# Altium PCB FelineFeastPCB.PcbDoc (part 2 of 2)
Units mm, origin at the board's own origin, x right, y up, seen from the top; angles counter-clockwise.
Board outline 55 x 55 mm, 2 copper layers (Top Layer, Bottom Layer); 81 components, 60 nets, 299 pads, 12 vias.
Unrouted connection lines stored in the file: 202.
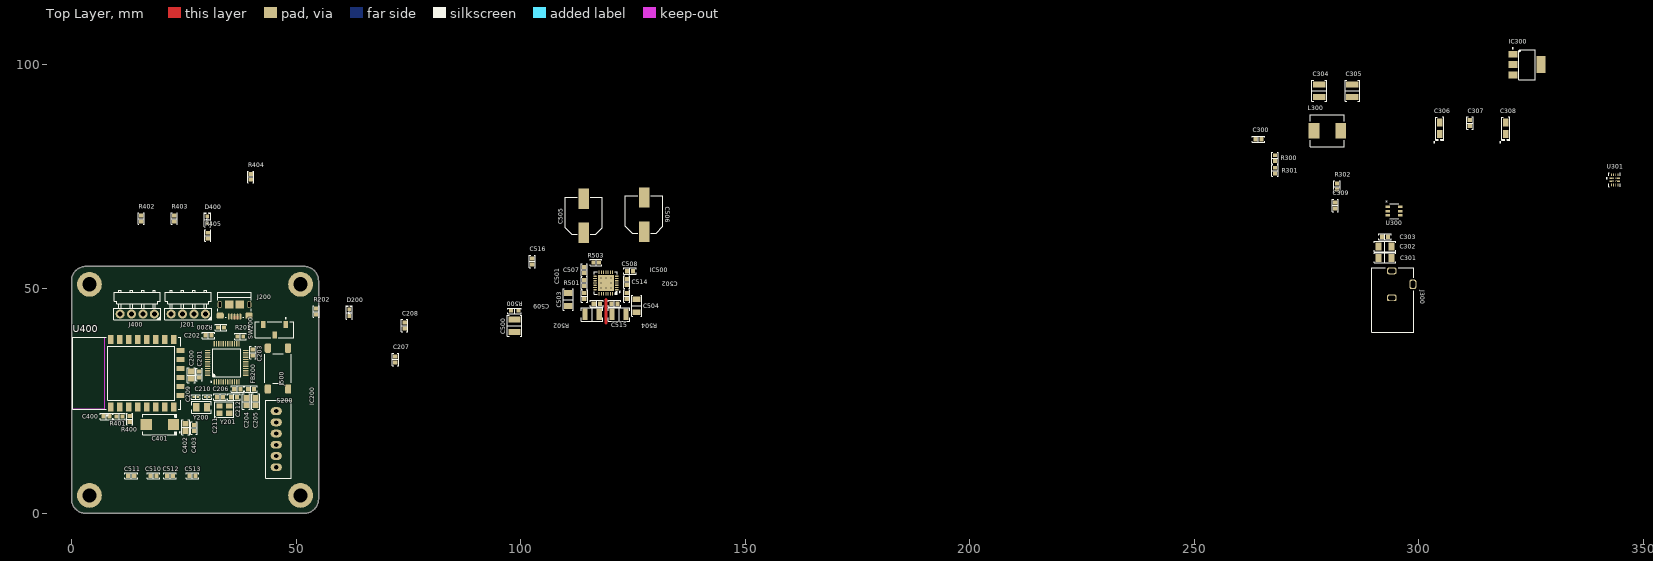
[diagram p0: Top Layer view]

## Part data (continued)
R202 R405: library part ERJ-3EKF8200V, "RES SMD 820 OHM 1% 1/10W 0603", Device Package="0603 (1608 Metric)", Manufacturer="Panasonic Electronic Components", Operating Temperature="-55°C ~ 155°C", Power (Watts)="0.1W, 1/10W", Ratings=AEC-Q200, Supplier Device Package=0603, Supplier Part Number 1=P820HCT-ND, Temperature Coefficient=±100ppm/°C, Tolerance=±1%, ComponentLink1Description=Datasheet, ComponentLink1URL=https://industrial.panasonic.com/cdbs/www-data/pdf/RDA0000/AOA0000C304.pdf, ComponentLink2Description="DigiKey Link", ComponentLink2URL=https://www.digikey.com/en/products/detail/panasonic-electronic-components/ERJ-3EKF8200V/1746447, Composition="Thick Film", Features="Automotive AEC-Q200", Height - Seated (Max)="0.022\" (0.55mm)", LastUpdated="09.02.2024 20:41:57", Lifecycle Status=Active, Minimum Order=1, Number of Terminations=2, Package / Case="0603 (1608 Metric)", Packaging=TapeAndReel, Part Number=ERJ-3EKF8200V, Part Status=Active, PartId=25993, Price=0.01, Resistance="820 Ohms", Series=ERJ-3EK, Size / Dimension="0.063\" L x 0.031\" W (1.60mm x 0.80mm)", Supplier 1=DigiKey
R300 R501: library part ERJ-3EKF1003V, "RES SMD 100K OHM 1% 1/10W 0603", Device Package="0603 (1608 Metric)", Manufacturer="Panasonic Electronic Components", Operating Temperature="-55°C ~ 155°C", Power (Watts)="0.1W, 1/10W", Ratings=AEC-Q200, Supplier Device Package=0603, Supplier Part Number 1=P100KHCT-ND, Temperature Coefficient=±100ppm/°C, Tolerance=±1%, ComponentLink1Description=Datasheet, ComponentLink1URL=https://industrial.panasonic.com/cdbs/www-data/pdf/RDA0000/AOA0000C304.pdf, ComponentLink2Description="DigiKey Link", ComponentLink2URL=https://www.digikey.com/en/products/detail/panasonic-electronic-components/ERJ-3EKF1003V/196075, Composition="Thick Film", Features="Automotive AEC-Q200", Height - Seated (Max)="0.022\" (0.55mm)", LastUpdated="09.02.2024 20:41:59", Lifecycle Status=Active, Minimum Order=1, Number of Terminations=2, Package / Case="0603 (1608 Metric)", Packaging=TapeAndReel, Part Number=ERJ-3EKF1003V, Part Status=Active, PartId=25699, Price=0.01, Resistance="100 kOhms", Series=ERJ-3EK, Size / Dimension="0.063\" L x 0.031\" W (1.60mm x 0.80mm)", Supplier 1=DigiKey
R301: library part ERJ-3EKF1372V, "RES SMD 13.7K OHM 1% 1/10W 0603", Device Package="0603 (1608 Metric)", Manufacturer="Panasonic Electronic Components", Operating Temperature="-55°C ~ 155°C", Power (Watts)="0.1W, 1/10W", Ratings=AEC-Q200, Supplier Device Package=0603, Supplier Part Number 1=P13.7KHCT-ND, Temperature Coefficient=±100ppm/°C, Tolerance=±1%, ComponentLink1Description=Datasheet, ComponentLink1URL=https://industrial.panasonic.com/cdbs/www-data/pdf/RDA0000/AOA0000C304.pdf, ComponentLink2Description="DigiKey Link", ComponentLink2URL=https://www.digikey.com/en/products/detail/panasonic-electronic-components/ERJ-3EKF1372V/196114, Composition="Thick Film", Features="Automotive AEC-Q200", Height - Seated (Max)="0.022\" (0.55mm)", LastUpdated="09.02.2024 20:41:57", Lifecycle Status=Active, Minimum Order=1, Number of Terminations=2, Package / Case="0603 (1608 Metric)", Packaging=TapeAndReel, Part Number=ERJ-3EKF1372V, Part Status=Active, PartId=26000, Price=0.01, Resistance="13.7 kOhms", Series=ERJ-3EK, Size / Dimension="0.063\" L x 0.031\" W (1.60mm x 0.80mm)", Supplier 1=DigiKey
R302: library part ERA-3AEB5112V, "RES SMD 51.1KOHM 0.1% 1/10W 0603", Device Package="0603 (1608 Metric)", Manufacturer="Panasonic Electronic Components", Operating Temperature="-55°C ~ 155°C", Power (Watts)="0.1W, 1/10W", Ratings=AEC-Q200, Supplier Device Package=0603, Supplier Part Number 1=P51.1KDBCT-ND, Temperature Coefficient=±25ppm/°C, Tolerance=±0.1%, ComponentLink1Description=Datasheet, ComponentLink1URL=https://industrial.panasonic.com/cdbs/www-data/pdf/RDM0000/AOA0000C307.pdf, ComponentLink2Description="DigiKey Link", ComponentLink2URL=https://www.digikey.com/en/products/detail/panasonic-electronic-components/ERA-3AEB5112V/2026902, Composition="Thin Film", Features="Automotive AEC-Q200", Height - Seated (Max)="0.022\" (0.55mm)", LastUpdated="09.02.2024 20:42:09", Lifecycle Status=Active, Minimum Order=1, Number of Terminations=2, Package / Case="0603 (1608 Metric)", Packaging=TapeAndReel, Part Number=ERA-3AEB5112V, Part Status=Active, PartId=24671, Price=0.03, Resistance="51.1 kOhms", Series=ERA-3A, Size / Dimension="0.063\" L x 0.031\" W (1.60mm x 0.80mm)", Supplier 1=DigiKey
R500: library part RC0603FR-071R1L, "RES 1.1 OHM 1% 1/10W 0603", Device Package="0603 (1608 Metric)", Manufacturer=Yageo, Operating Temperature="-55°C ~ 155°C", Power (Watts)="0.1W, 1/10W", Supplier Device Package=0603, Supplier Part Number 1=13-RC0603FR-071R1LCT-ND, Temperature Coefficient=±200ppm/°C, Tolerance=±1%, ComponentLink1Description=Datasheet, ComponentLink1URL=https://www.yageo.com/upload/media/product/productsearch/datasheet/rchip/PYu-RC_Group_51_RoHS_L_11.pdf, ComponentLink2Description="DigiKey Link", ComponentLink2URL=https://www.digikey.com/en/products/detail/yageo/RC0603FR-071R1L/5918279, Composition="Thick Film", Features="Moisture Resistant", Height - Seated (Max)="0.022\" (0.55mm)", LastUpdated="25.07.2024 9:19:12", Lifecycle Status=Active, Minimum Order=1, Number of Terminations=2, Package / Case="0603 (1608 Metric)", Packaging=TapeAndReel, Part Number=RC0603FR-071R1L, Part Status=Active, PartId=61999, Price=0.01, Resistance="1.1 Ohms", Series=RC_L, Size / Dimension="0.063\" L x 0.031\" W (1.60mm x 0.80mm)", Supplier 1=DigiKey
R502 R504: library part RL1210FR-070R11L, "RES 0.11 OHM 1% 1/2W 1210", Device Package="1210 (3225 Metric)", Manufacturer=Yageo, Operating Temperature="-55°C ~ 155°C", Power (Watts)="0.5W, 1/2W", Ratings=AEC-Q200, Supplier Device Package=1210, Supplier Part Number 1=13-RL1210FR-070R11LCT-ND, Temperature Coefficient=±600ppm/°C, Tolerance=±1%, ComponentLink1Description=Datasheet, ComponentLink1URL=https://www.yageo.com/upload/media/product/app/datasheet/rchip/pyu-rl_group_521_rohs_l.pdf, ComponentLink2Description="DigiKey Link", ComponentLink2URL=https://www.digikey.com/en/products/detail/yageo/RL1210FR-070R11L/5925206, Composition="Thick Film", Features="Automotive AEC-Q200, Current Sense, Moisture Resistant", Height - Seated (Max)="0.026\" (0.65mm)", LastUpdated="03.06.2024 20:18:34", Lifecycle Status=Active, Minimum Order=1, Number of Terminations=2, Package / Case="1210 (3225 Metric)", Packaging=TapeAndReel, Part Number=RL1210FR-070R11L, Price=0.07, Resistance="110 mOhms", Series=RL, Size / Dimension="0.122\" L x 0.102\" W (3.10mm x 2.60mm)", Supplier 1=DigiKey
R503: library part ERJ-3EKF1001V, "RES SMD 1K OHM 1% 1/10W 0603", Device Package="0603 (1608 Metric)", Manufacturer="Panasonic Electronic Components", Operating Temperature="-55°C ~ 155°C", Power (Watts)="0.1W, 1/10W", Ratings=AEC-Q200, Supplier Device Package=0603, Supplier Part Number 1=P1.00KHCT-ND, Temperature Coefficient=±100ppm/°C, Tolerance=±1%, ComponentLink1Description=Datasheet, ComponentLink1URL=https://industrial.panasonic.com/cdbs/www-data/pdf/RDA0000/AOA0000C304.pdf, ComponentLink2Description="DigiKey Link", ComponentLink2URL=https://www.digikey.com/en/products/detail/panasonic-electronic-components/ERJ-3EKF1001V/196032, Composition="Thick Film", Features="Automotive AEC-Q200", Height - Seated (Max)="0.022\" (0.55mm)", LastUpdated="09.02.2024 20:42:00", Lifecycle Status=Active, Minimum Order=1, Number of Terminations=2, Package / Case="0603 (1608 Metric)", Packaging=TapeAndReel, Part Number=ERJ-3EKF1001V, Part Status=Active, PartId=25687, Price=0.01, Resistance="1 kOhms", Series=ERJ-3EK, Size / Dimension="0.063\" L x 0.031\" W (1.60mm x 0.80mm)", Supplier 1=DigiKey
S200: "SWITCH TACTILE SPST-NO 0.05A 24V", Contact Rating @ Voltage="0.05A @ 24VDC", Manufacturer="TE Connectivity ALCOSWITCH Switches", Operating Force=160gf, Operating Temperature="-35°C ~ 85°C", Supplier Part Number 1=450-1133-ND, Actuator Height off PCB, Vertical=7.00mm, Actuator Orientation="Top Actuated", Actuator Type=Standard, Circuit=SPST-NO, ComponentLink1Description=Datasheet, ComponentLink1URL=https://www.te.com/commerce/DocumentDelivery/DDEController?Action=srchrtrv&DocNm=1308111-1_SWITCHES_CORE_PROGRAM_CATALOG&DocType=CS&DocLang=English, ComponentLink2Description="DigiKey Link", ComponentLink2URL=https://www.digikey.com/en/products/detail/te-connectivity-alcoswitch-switches/FSM6JSMA/525822, Illumination=Non-Illuminated, LastUpdated="03.06.2024 20:19:31", Lifecycle Status=Active, Minimum Order=1, Mounting Type="Surface Mount", Outline="6.00mm x 6.00mm", Packaging=Bulk, Part Number=FSM6JSMA, Part Status=Active, Price=0.17, Series=FSMJSMA, Supplier 1=DigiKey, Switch Function=Off-Mom, Termination Style="Gull Wing"
SW200: library part CMP-10038-000010-1, "SWITCH SLIDE SPDT 300MA 6V", Current Rating=300mA, Max Operating Temperature=85°C, Min Operating Temperature=-40°C, Voltage Rating (DC)=6V, Actuator Length=2mm, Actuator Material=Nylon, Actuator Type=Standard, Contact Material="Copper Alloy", Contact Plating=Silver, Electrical Life=5000Cycles, Mount="Surface Mount", Packaging="Cut Tape", Switch Function=On-On, Switch Travel=2mm, Throw Configuration=SPDT
U300: "SIMPLE SWITCHER&reg; 4.5-V to 36-V, 3-A synchronous buck converter with 40-&micro;A IQ 6-SOT-23-THIN -40 to 150", Manufacturer_Name="Texas Instruments", Copyright="Copyright (C) 2026 Ultra Librarian. All rights reserved.", Manufacturer_Part_Number=LMR51430XDDCR, RefDes=RefDes, Type=Type
U301: library part CMP-04910-000091-1, "PWR MGMT BATTERY MGMT"
U400: "This WiFi module has a 32-bit MCU micro and clock speeds supporting 80 MHz or 160 MHz. Supports the RTOS and integrated Wi-Fi MAC/BB/RF/PA/LNA, and has an on-board antenna.", Package=None, Availability="Not in stock", Check_prices=https://www.snapeda.com/parts/ESP8266-12E/ESP-12E/AI-Thinker/view-part/?ref=eda, MF=AI-Thinker, MP=ESP8266-12E/ESP-12E, Price=None, SnapEDA_Link=https://www.snapeda.com/parts/ESP8266-12E/ESP-12E/AI-Thinker/view-part/?ref=snap
Y200: library part ABS07-166-32.768KHZ-T, "CRYSTAL 32.7680KHZ 7PF SMD", ESR (Equivalent Series Resistance)="70 kOhms", Frequency Tolerance=±10ppm, Load Capacitance=7pF, Manufacturer="Abracon LLC", Operating Mode=Fundamental, Operating Temperature="-40°C ~ 85°C", Package / Case="2-SMD, No Lead", Supplier Part Number 1=535-14514-1-ND, ComponentLink1Description=Datasheet, ComponentLink1URL=https://abracon.com/datasheets/ABS07-166-32.768kHz-T.pdf, ComponentLink2Description="DigiKey Link", ComponentLink2URL=https://www.digikey.com/en/products/detail/abracon-llc/ABS07-166-32-768KHZ-T/8827199, Frequency="32.768 kHz", Height - Seated (Max)="0.035\" (0.90mm)", LastUpdated="03.06.2024 20:02:04", Lifecycle Status=Active, Minimum Order=1, Mounting Type="Surface Mount", Packaging=TapeAndReel, Part Number=ABS07-166-32.768KHZ-T, Part Status=Active, PartId=384, Price=0.38, Series=ABS07, Size / Dimension="0.126\" L x 0.059\" W (3.20mm x 1.50mm)", Supplier 1=DigiKey, Type="kHz Crystal (Tuning Fork)"
Y201: library part NX3225GA-16.000M-STD-CRG-2, "CRYSTAL 16.0000MHZ 8PF SMD", ESR (Equivalent Series Resistance)="80 Ohms", Frequency Stability=±30ppm, Frequency Tolerance=±20ppm, Load Capacitance=8pF, Manufacturer="NDK America, Inc.", Operating Mode=Fundamental, Operating Temperature="-40°C ~ 85°C", Package / Case="4-SMD, No Lead", Supplier Part Number 1=644-1175-1-ND, ComponentLink1Description=Datasheet, ComponentLink1URL=http://www.ndk.com/images/products/catalog/c_NX3225GA-STD-CRG-2_e.pdf, ComponentLink2Description="DigiKey Link", ComponentLink2URL=https://www.digikey.com/en/products/detail/ndk-america-inc/NX3225GA-16-000M-STD-CRG-2/3125634, Frequency="16 MHz", Height - Seated (Max)="0.035\" (0.90mm)", LastUpdated="03.06.2024 20:02:19", Lifecycle Status=Active, Minimum Order=1, Mounting Type="Surface Mount", Packaging=TapeAndReel, Part Number=NX3225GA-16.000M-STD-CRG-2, Part Status=Active, PartId=549, Price=0.33, Series=NX3225GA, Size / Dimension="0.126\" L x 0.098\" W (3.20mm x 2.50mm)", Supplier 1=DigiKey, Type="MHz Crystal"

## Free pads (board coordinates)
  round 5.5 hole 3.2: H1(4,51) H2(51,51) H3(4,4) H4(51,4)

## Via types
v1: diameter 0.5, hole 0.2, Top Layer to Bottom Layer, tented both sides, 8 vias
v2: diameter 0.4, hole 0.2, Top Layer to Bottom Layer, 4 vias

## Nets (pads, with @x,y where several pads share a name; then routed paths per layer and width w, separated by ;. In a path a pad name is that pad's centre, name@x,y a point inside that pad or via, vN(x,y) a via of type N, cw(c..) or ccw(c..) an arc to the next point about the centre after c; other vN are vias at no path point)
+3.3V: C200.1 C201.2 C202.2 C203.2 C204.2 C308.1 C401.1 C402.1 C403.2 C507.2 FB200.1 IC200.24 IC200.36 IC200.48 IC300.2 IC300.4 IC500.15 J201.1 J400.1 R200.2 R400.2 R401.2 R402.1 R403.1 SW200.3 U400.8
+3.3VA: C205.2 C206.2 FB200.2 IC200.9
+5V: C304.2 C305.2 L300.2 R300.2 U301.7
  other v2: 344.026,73.945
+24V: C301.2 C302.2 C303.2 C500.2 C501.2 C502.2 C503.2 C504.2 C505.1 C506.1 C508.1 IC500.22 IC500.28 J300.1 U300.3 U300.5
+VBAT: B200.1 C207.2 IC200.1
A+: C510.2 IC500.24 J500.3
A-: C511.2 IC500.21 J500.1
B+: C512.2 IC500.26 J500.4
B-: C513.2 IC500.1 J500.6
BOOT0: IC200.44 R201.2
CLK: IC200.39 U400.14
CS: IC200.19 U400.9
CTRL_BTN: IC200.46 S200.1 S200.2
DIAG: IC200.27 IC500.11
DIR: IC200.22 IC500.19
EN: R400.1 U400.3
ENN: IC200.25 IC500.2
GND: B200.2 C200.2 C201.1 C202.1 C203.1 C204.1 C205.1 C206.1 C207.1 C208.2 C209.1 C210.1 C211.2 C212.2 C301.1 C302.1 C303.1 C304.1 C305.1 C306.2 C307.1 C308.2 C309.1 C400.1 C401.2 C402.2 C403.1 C501.1 C502.1 C503.1 C504.1 C505.2 C506.2 C507.1 C509.2 C510.1 C511.1 C512.1 C513.1 C515.2 C516.1 D200.2 IC200.8 IC200.23 IC200.35 IC200.47 IC300.1 IC500.3 IC500.7 IC500.9 IC500.10 IC500.13 IC500.18 IC500.25 IC500.29 J200.5 J201.4 J300.2 J400.4 R301.1 R302.1 R404.1 R405.1 R500.1 R501.2 R502.1 R504.1 S200.3 S200.4 SW200.1 U300.1 U301.3 U301.4 U301.5 U301.6 U301.12 U400.15 Y201.2 Y201.4
  other v1: 117.899,50.208 118.999,50.208 120.099,50.208 117.899,51.308 120.099,51.308 117.899,52.408 118.999,52.408 120.099,52.408
INDEX: IC200.26 IC500.12
MISO: IC200.40 U400.10
MOSI: IC200.41 U400.13
NET_STA_LED: D400.1 U400.6
NetC209_2: C209.2 IC200.3 Y200.1
NetC210_2: C210.2 IC200.4 Y200.2
NetC211_1: C211.1 IC200.5 Y201.1
NetC212_1: C212.1 IC200.6 Y201.3
NetC300_1: C300.1 L300.1 U300.2
NetC300_2: C300.2 U300.6
NetC306_1: C306.1 C307.2 IC300.3 U301.1 U301.8
  other v2: 343.226,74.645 344.026,74.645
NetC309_2: C309.2 U301.11
NetC500_1: C500.1 R500.2
NetC508_2: C508.2 IC500.6
NetC509_1: C509.1 IC500.23 R502.2
NetC514_1: C514.1 IC500.4
NetC514_2: C514.2 IC500.5
NetC515_1: C515.1 IC500.27 R504.2
NetC516_2: C516.2 IC500.8
NetD200_1: D200.1 R202.1
NetD400_2: D400.2 R405.2
NetIC200_18: IC200.18 U301.9
NetIC200_34: IC200.34 J201.2
NetIC200_37: IC200.37 J201.3
NetIC500_20: IC500.20 R501.1
NetJ400_2: J400.2 U400.21
NetJ400_3: J400.3 U400.22
NetR201_1: R201.1 SW200.2
NetR300_1: R300.1 R301.2 U300.4
NetR302_2: R302.2 U301.10
NetR402_2: R402.2 U400.18
NetR403_2: R403.2 U400.17
NetR404_2: R404.2 U400.16
NRST: C208.1 IC200.7
RST: C400.2 R401.1 U400.1 U400.4
STA_LED: IC200.28 R202.2
STEP: IC200.21 IC500.16
UART_RX: IC200.42 IC500.14 R503.2
UART_TX: IC200.43 R503.1
USB_N: IC200.32 J200.2 | length 0.5
  Top Layer w0.381: J200.2@36.943,43.329 36.946,43.333 36.946,43.821 J200.2
USB_P: IC200.33 J200.3 R200.1 | length 0.5
  Top Layer w0.381: J200.3 36.304,43.821 36.304,43.333 J200.3@36.308,43.329
VBUS: J200.1 U301.2
  other v2: 343.226,73.945
pads on no net: IC200.2 IC200.10 IC200.11 IC200.12 IC200.13 IC200.14 IC200.15 IC200.16 IC200.17 IC200.20 IC200.29 IC200.30 IC200.31 IC200.38 IC200.45 IC500.17 J200.4 J200.S J300.3 J500.2 J500.5 U400.2 U400.5 U400.7 U400.11 U400.12 U400.19 U400.20
copper on no net: | length 5.2
  Top Layer w0.7: 118.999,42.418 119,47.625

## Silkscreen, mask and mechanical layers (free items; w line width, h text height)
Mechanical 1:
  the board outline again, w0.254

## Text inside footprints (layer, text, board x,y; h text height)
U300: Top Overlay "*" at 292.566,68.691 h1; Mechanical 13 "*" at 293.7,67.488 h1